# Altium PCB Task_5.PcbDoc
Units mm, origin at the board's own origin, x right, y up, seen from the top; angles counter-clockwise.
Board outline 69.98 x 20.07 mm, 2 copper layers (Top Layer, Bottom Layer); 13 components, 41 nets, 88 pads, 73 vias.
Unrouted connection lines stored in the file: 3.
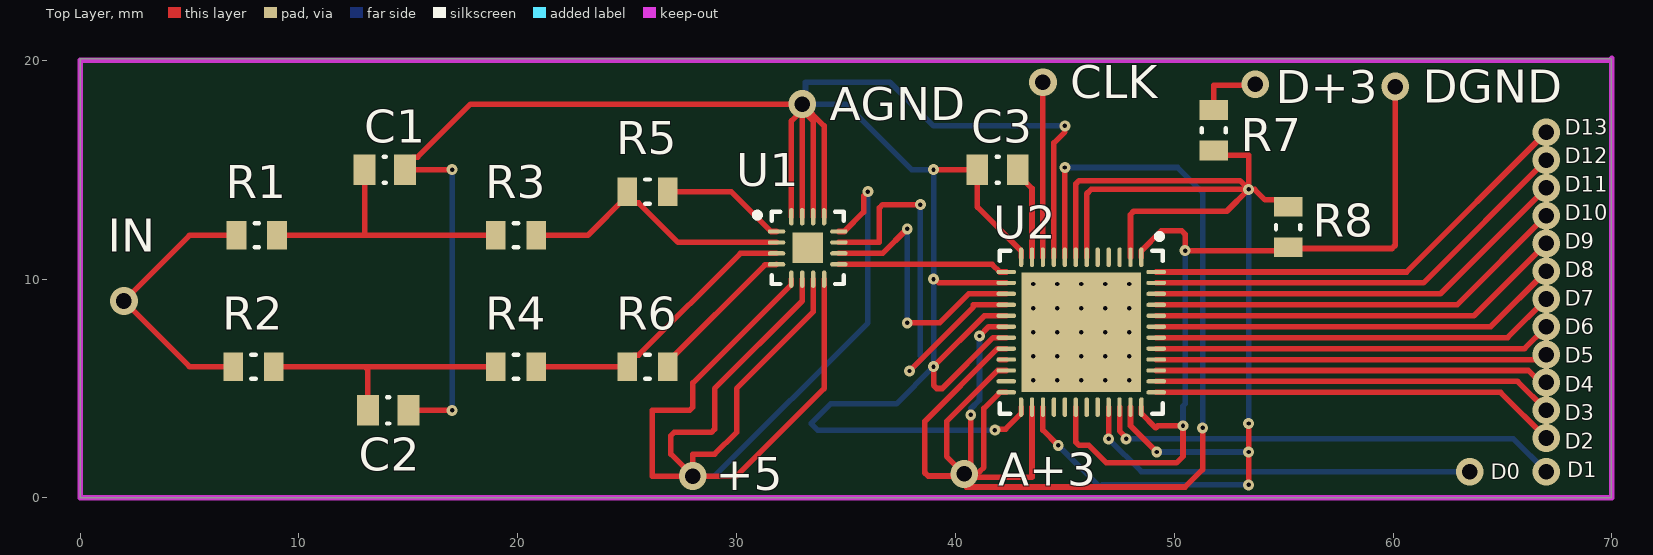
[diagram p0: Top Layer view]
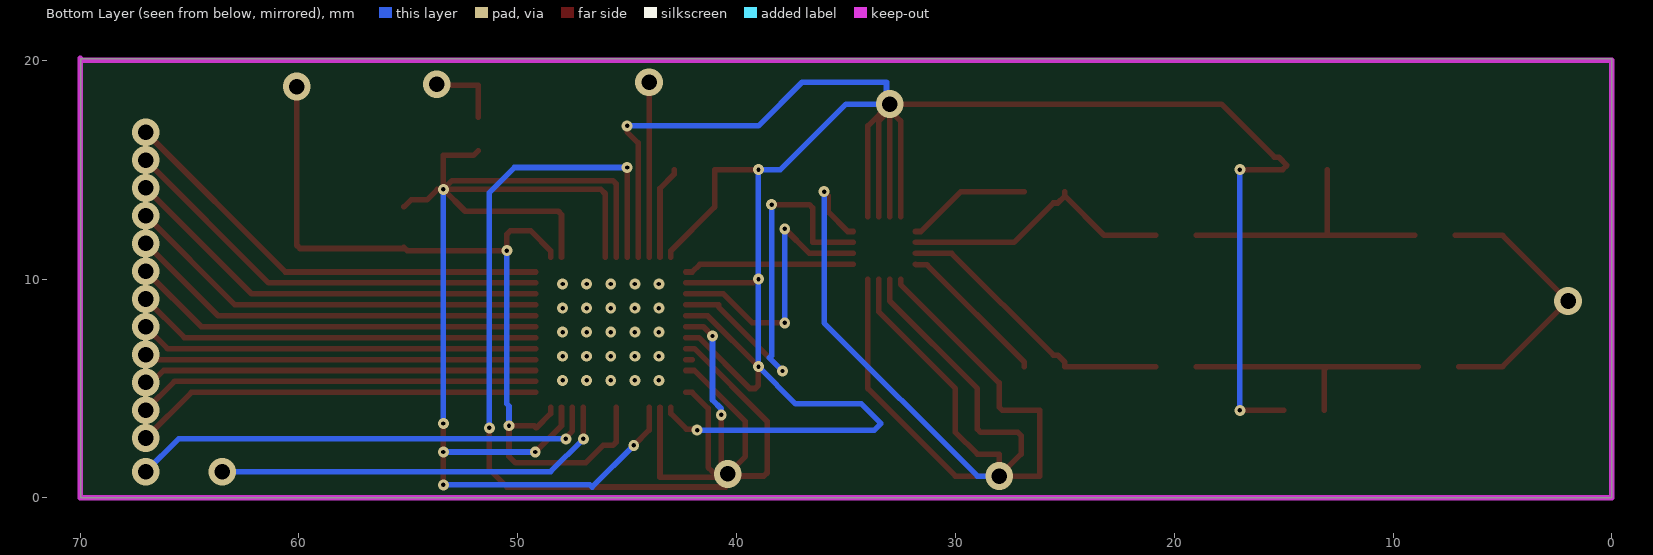
[diagram p1: Bottom Layer view, seen from below]

## Layer stack, top to bottom
Top Solder: solder mask 0.0102, Solder Resist, Dk 3.5
Top Layer: signal copper 0.0356
Dielectric 1: dielectric 0.32, FR-4, Dk 4.8
Bottom Layer: signal copper 0.0356
Bottom Solder: solder mask 0.0102, Solder Resist, Dk 3.5

## Board outline
0,0 69.977,0 69.977,0.381 69.977,20.066 0,20.066

## Design rules (kind name [scope] priority, off if disabled: settings)
AssemblyTestpoint [All] p1 off: testpointundercomponent=TRUE minsize=1.016 maxsize=2.54 preferedsize=1.524 minholesize=0 maxholesize=1.016 preferedholesize=0.813 testpointgrid=0.025 usegrid=TRUE gridtolerance=0 allowsidetop=TRUE allowsidebottom=TRUE
Clearance [All] p1 off: gap=0.254 ignorepadtopadclearanceinfootprint=FALSE except(0: Arc-Hole Track-Hole SMDPad-Hole THPad-Hole Via-Hole Fill-Hole Poly-Hole Region-Hole Text-Hole)
ComponentClearance [All] p1 off: gap=0.254 collisioncheckmode=3 verticalgap=0.254 showdistances=FALSE
HoleToHoleClearance [All] p1 off: gap=0.254 allowstackedmicrovias=TRUE
PolygonConnect [All] p1: connectstyle=Relief reliefconductorwidth=0.254 reliefentries=4 polygonreliefangle="90 Angle" airgapwidth=0.254
RoutingVias [All] p1: holewidth=0.711 width=1.27 viastyle="Through Hole" minholewidth=0.711 minwidth=1.27 maxholewidth=0.711 maxwidth=1.27
SolderMaskExpansion [All] p1: expansion=0.102 istentingtop=FALSE
Width [All] p1: maxlimit=0.254 minlimit=0.254 preferedwidth=0.254
27 further rules are at their usual default settings.

## Components (designator, comment, footprint, x,y, rotation, side; value= is the part's Value field where it differs from the comment)
C1 "С" C 13.925,15 r0 top value=200n
C2 "С" C 14.075,4 r0 top value=200n
C3 "С" C 41.925,15 r180 top value=200n
R1 "R" R 8.075,12 r0 top value=1K
R2 "R" R 7.925,6 r0 top value=1K
R3 "R" R 19.925,12 r0 top value=1K
R4 "R" R 19.925,6 r0 top value=1K
R5 "R" R 25.925,14 r180 top value=1K
R6 "R" R 25.925,6 r180 top value=1K
R7 "R" R 51.8,16.8 r270 top value=1K
R8 "R" R 55.2,12.375 r270 top value=1K
U1 "ADA4932-1" ADA4932 33.25,11.425 r0 top
U2 "ADS61B29" ADS61B29 45.75,7.575 r270 top

## Footprints (in the part's own frame and the unit in brackets; to place one, negate y for a bottom-side part, rotate by r counter-clockwise, add the part's x,y. Pads: shape width x height; smd on the part's side, far side on the other; paste and mask are expansions set on the pad)
ADA4932 [mm] "QFN, 16-Leads, Body 3,00x3,00mm, Pitch 0,50mm, Thermal Pad 1,40x1,40mm, IPC Medium Density"
  oval 0.8x0.2 smd: 1(-1.425,0.75) 2(-1.425,0.25) 3(-1.425,-0.25) 4(-1.425,-0.75) 9(1.425,-0.75) 10(1.425,-0.25) 11(1.425,0.25) 12(1.425,0.75)
  oval 0.2x0.8 smd: 5(-0.75,-1.425) 6(-0.25,-1.425) 7(0.25,-1.425) 8(0.75,-1.425) 13(0.75,1.425) 14(0.25,1.425) 15(-0.25,1.425) 16(-0.75,1.425)
  rect 1.4x1.4 smd: 17(0,0)
  silkscreen extent -2.42,-1.65 1.65,1.65, body extent -1.5,-1.5 1.5,1.5, height 1
ADS61B29 [mm] "QFN, 48-Leads, Body 7,00x7,00mm, Pitch 0,50mm, Thermal Pad 5,45x5,45mm, IPC Medium Density"
  oval 0.9x0.2 smd: 1(-3.425,2.75) 2(-3.425,2.25) 3(-3.425,1.75) 4(-3.425,1.25) 5(-3.425,0.75) 6(-3.425,0.25) 7(-3.425,-0.25) 8(-3.425,-0.75) 9(-3.425,-1.25) 10(-3.425,-1.75) 11(-3.425,-2.25) 12(-3.425,-2.75) 25(3.425,-2.75) 26(3.425,-2.25) 27(3.425,-1.75) 28(3.425,-1.25) 29(3.425,-0.75) 30(3.425,-0.25) 31(3.425,0.25) 32(3.425,0.75) 33(3.425,1.25) 34(3.425,1.75) 35(3.425,2.25) 36(3.425,2.75)
  oval 0.2x0.9 smd: 13(-2.75,-3.425) 14(-2.25,-3.425) 15(-1.75,-3.425) 16(-1.25,-3.425) 17(-0.75,-3.425) 18(-0.25,-3.425) 19(0.25,-3.425) 20(0.75,-3.425) 21(1.25,-3.425) 22(1.75,-3.425) 23(2.25,-3.425) 24(2.75,-3.425) 37(2.75,3.425) 38(2.25,3.425) 39(1.75,3.425) 40(1.25,3.425) 41(0.75,3.425) 42(0.25,3.425) 43(-0.25,3.425) 44(-0.75,3.425) 45(-1.25,3.425) 46(-1.75,3.425) 47(-2.25,3.425) 48(-2.75,3.425)
  rect 5.45x5.45 smd: 49(0,0)
  silkscreen extent -4.5,-3.73 3.73,3.72, body extent -3.57,-3.58 3.58,3.57, height 1
C [mm] "Chip Capacitor, 2-Leads, Body 2,05x1,27mm, IPC Medium Density"
  rect 1x1.4 smd: 1(-0.925,0) 2(0.925,0)
  silkscreen extent -0.05,-0.6 0.05,0.6, body extent -1,-0.63 1,0.63, height 0.6
R [mm] "Chip Resistor, 2-Leads, Body 2,00x1,25mm, IPC Medium Density"
  rect 0.9x1.3 smd: 1(-0.925,0) 2(0.925,0)
  silkscreen extent -0.1,-0.55 0.1,0.55, body extent -1,-0.63 1,0.63, height 0.6

## Via types
v1: diameter 0.5, hole 0.2, Top Layer to Bottom Layer, 51 vias
v2: diameter 1.27, hole 0.711, Top Layer to Bottom Layer, 22 vias

## Nets (pads, with @x,y where several pads share a name; then routed paths per layer and width w, separated by ;. In a path a pad name is that pad's centre, name@x,y a point inside that pad or via, vN(x,y) a via of type N, cw(c..) or ccw(c..) an arc to the next point about the centre after c; other vN are vias at no path point)
+3: R7.1
+3.3: U2.8 U2.18 U2.20 U2.22 U2.24 U2.26 | length 69.6
  Top Layer w0.254: 40.4,1.1 39.6,1.9 39.6,3.5 41.925,5.825 U2.22 ; v1(40.7,3.8) 40.7,1.207 40.496,1.004 ; 41.1,1.2 41.3,1.4 41.3,4.096 42.029,4.825 U2.24 ; v1(41.1,7.4) 41.525,7.825 U2.18 ; U2.20 41.925,6.825 38.6,3.5 38.6,1.152 38.749,1.004 40.496,1.004 ; U2.26 43.5,0.949 40.551,0.949 40.496,1.004 ; U2.8 v1(45,15.1) ; v1(51.3,3.2) 51.3,1.3 50.5,0.5 40.501,0.5 40.496,0.504 40.496,1.004
  Bottom Layer w0.254: v1(40.7,3.8) 40.7,4.075 41.1,4.475 v1(41.1,7.4) ; v1(45,15.1) 50.151,15.1 51.3,13.951 v1(51.3,3.2)
+5: U1.5 U1.6 U1.7 U1.8 U1.12 | length 71.3
  Top Layer w0.254: U1.5 32.5,9.754 28,5.254 28,4.149 27.851,4 26.149,4 26.149,1 28,1 ; U1.6 33,9 29,5 29,3.149 28.851,3 27.149,3 27,2.851 27,2 28,1 ; U1.7 33.5,8.5 30,5 30,3 29,2 28,2 28,1 ; U1.8 34,5 30,1 28,1 ; U1.12 34.921,12.175 35.806,13.06 35.806,13.806 v1(36,14)
  Bottom Layer w0.254: 28,1 29,1 36,8 v1(36,14)
DGND: R8.2 U2.1 U2.30 U2.36 | length 39.4
  Top Layer w0.254: U2.30 45.5,2.549 45.649,2.4 46.1,2.4 46.9,1.6 50.1,1.6 50.4,1.9 v1(50.4,3.3) 49.254,3.3 49.154,3.2 48.5,3.854 U2.36 ; U2.1 48.5,11.296 49.404,12.2 50.351,12.2 50.5,12.051 v1(50.5,11.3) 55.05,11.3 R8.2 55.25,11.4 59.951,11.4 60.1,11.549 60.1,18.8
  Bottom Layer w0.254: v1(50.4,3.3) 50.4,4.2 50.5,4.3 v1(50.5,11.3)
GND: C1.2 C2.2 C3.2 U1.13 U1.14 U1.15 U1.16 U2.9 U2.12 U2.14 U2.17 U2.19 U2.25 | length 128.3
  Top Layer w0.254: C2.2 v1(17,4) ; v1(17,15) 15.05,15 14.85,15.2 15.223,15.573 15.423,15.573 17.85,18 v2(33,18) ; U1.16 32.5,17.225 v2@33,17.725 ; U1.15 v2@33,17.725 ; U1.14 33.5,17.225 v2@33,17.725 ; U1.13 34,17 v2(33,18) ; v1(39,10) 39.067,10 39.242,9.825 U2.14 ; v1(39,15) C3.2 41,13.296 43,11.296 U2.12 ; v1(41.8,3.1) 41.847,3.147 42.293,3.147 43,3.854 U2.25 ; U2.19 41.725,7.325 39.4,5 39.149,5 39,5.149 v1(39,6) 41.325,8.325 U2.17 ; U2.9 44.5,16.225 45,16.725 v1(45,17) ; v2@33,17.725 v2(33,18)
  Bottom Layer w0.254: v1(17,4) v1(17,15) ; v1(41.8,3.1) 33.7,3.1 33.405,3.395 33.405,3.405 34.3,4.3 37.3,4.3 v1(39,6) v1(39,10) v1(39,15) 38,15 35,18 v2(33,18) 33.149,18.149 33.149,19 37,19 39,17 v1(45,17)
NetC1_1: C1.1 R1.2 R3.1 | length 13
  Top Layer w0.254: R1.2 13,12 ; C1.1 13,12 ; R3.1 13,12
NetC2_1: C2.1 R2.2 R4.1 | length 12.2
  Top Layer w0.254: R2.2 13,6 ; C2.1 13.15,5.85 13,6 ; R4.1 13,6
NetC3_1: C3.1 U2.11 | length 4.3
  Top Layer w0.254: C3.1 42.85,14.8 43.5,14.15 U2.11
NetR1_1: R1.1 R2.1
NetR3_2: R3.2 R5.2 U1.2 | length 12.8
  Top Layer w0.254: R3.2 23.2,12 R5.2@25,13.8 ; R5.2 R5.2@25,13.8 ; U1.2 27.325,11.675 25.523,13.477 25.323,13.477 R5.2@25,13.8
NetR4_2: R4.2 R6.2 U1.3 | length 13.2
  Top Layer w0.254: R4.2 R6.2 25,6.2 25.323,6.523 25.523,6.523 30.175,11.175 U1.3
NetR5_1: R5.1 U1.1 | length 5.7
  Top Layer w0.254: R5.1 29.754,14 31.579,12.175 U1.1
NetR6_1: R6.1 U1.4 | length 7
  Top Layer w0.254: R6.1 26.85,6.2 31.298,10.648 31.798,10.648 U1.4
NetR7_2: R7.2 R8.1 U2.2 U2.6 U2.7 U2.27 U2.35 | length 70.6
  Top Layer w0.254: U2.27 44,3.1 v1(44.7,2.4) ; U2.7 45.5,14.351 45.649,14.5 53,14.5 v1(53.4,14.1) ; U2.6 46,13.9 46.2,14.1 v1(53.4,14.1) ; U2.35 48,3.3 v1(49.2,2.1) ; U2.2 48,12.951 48.149,13.1 52.4,13.1 v1(53.4,14.1) ; R7.2 52.024,15.651 53.4,15.651 v1(53.4,14.1) ; 51.8,17.4 51.8,18.851 53.749,18.851 53.9,18.7 ; v1(53.4,0.6) v1(53.4,2.1) v1(53.4,3.4) ; R8.1 54.877,13.623 54.152,13.623 53.675,14.1 v1(53.4,14.1)
  Bottom Layer w0.254: v1(44.7,2.4) 46.6,0.5 46.7,0.6 v1(53.4,0.6) ; v1@49.133,2.1 v1(49.2,2.1) v1(53.4,2.1) ; v1(53.4,3.4) v1(53.4,14.1)
NetU1_9: U1.9 U2.13 | length 7.8
  Top Layer w0.254: U1.9 41.679,10.675 42.029,10.325 U2.13
NetU1_10: U1.10 U2.15 | length 13
  Top Layer w0.254: U1.10 36.675,11.175 v1(37.8,12.3) ; v1(37.8,8) 39.275,8 40.6,9.325 U2.15
  Bottom Layer w0.254: v1(37.8,8) v1(37.8,12.3)
NetU1_11: U1.11 U2.16 | length 19
  Top Layer w0.254: U1.11 36.526,11.675 36.526,13.251 36.675,13.4 v1(38.4,13.4) ; v1(37.9,5.8) 40.825,8.725 40.825,8.825 U2.16
  Bottom Layer w0.254: v1(37.9,5.8) 38.5,6.4 38.4,6.5 v1(38.4,13.4)
NetU2_3: U2.3
NetU2_4: U2.4
NetU2_5: U2.5
NetU2_10: U2.10 | length 8
  Top Layer w0.254: U2.10 v2(44,19)
NetU2_21: U2.21 | length 0.3
  Top Layer w0.254: U2.21@42.029,6.325 U2.21
NetU2_23: U2.23
NetU2_28: U2.28
NetU2_29: U2.29
NetU2_31: U2.31
NetU2_32: U2.32
NetU2_33: U2.33 | length 18.6
  Top Layer w0.254: v1(47,2.7) U2.33
  Bottom Layer w0.254: v1(47,2.7) 48.5,1.2 63.5,1.2
NetU2_34: U2.34 | length 21.4
  Top Layer w0.254: U2.34 47.5,3.067 47.8,2.767 v1(47.8,2.7)
  Bottom Layer w0.254: v1(47.8,2.7) 65.5,2.7 67,1.2
NetU2_37: U2.37 | length 18.7
  Top Layer w0.254: U2.37 64.915,4.825 v2(67,2.74)
NetU2_38: U2.38 | length 18.4
  Top Layer w0.254: U2.38 65.685,5.325 v2(67,4.01)
NetU2_39: U2.39 | length 18.1
  Top Layer w0.254: U2.39 66.18,5.825 66.725,5.28 v2(67,5.28)
NetU2_40: U2.40 | length 17.9
  Top Layer w0.254: U2.40 66.5,6.325 66.725,6.55 v2(67,6.55)
NetU2_41: U2.41 | length 18.2
  Top Layer w0.254: U2.41 66.005,6.825 v2(67,7.82)
NetU2_42: U2.42 | length 18.6
  Top Layer w0.254: U2.42 65.235,7.325 v2(67,9.09)
NetU2_43: U2.43 | length 18.9
  Top Layer w0.254: U2.43 64.465,7.825 v2(67,10.36)
NetU2_44: U2.44 | length 19.2
  Top Layer w0.254: U2.44 63.695,8.325 v2(67,11.63)
NetU2_45: U2.45 | length 19.5
  Top Layer w0.254: U2.45 62.925,8.825 v2(67,12.9)
NetU2_46: U2.46 | length 19.8
  Top Layer w0.254: U2.46 62.155,9.325 v2(67,14.17)
NetU2_47: U2.47 | length 20.2
  Top Layer w0.254: U2.47 61.385,9.825 v2(67,15.44)
NetU2_48: U2.48 | length 20.5
  Top Layer w0.254: U2.48 60.615,10.325 v2(67,16.71)
pads on no net: U1.17 U2.49
copper on no net: | length 12.6
  Top Layer w0.254: 7,6 5,6 v2(2,9) 5,12 7.15,12
  other v1: 43.55,5.375 44.65,5.375 45.75,5.375 46.85,5.375 47.95,5.375 43.55,6.475 44.65,6.475 45.75,6.475 46.85,6.475 47.95,6.475 43.55,7.575 44.65,7.575 45.75,7.575 46.85,7.575 47.95,7.575 43.55,8.675 44.65,8.675 45.75,8.675 46.85,8.675 47.95,8.675 43.55,9.775 44.65,9.775 45.75,9.775 46.85,9.775 47.95,9.775
  other v2: 28,1 40.4,1.1 40.4,1.1 63.5,1.2 67,1.2 60.1,18.8 53.7,18.9

## Keep-outs
Top Layer:
  lines w0.254: 69.9,20 70,20.1
Keep-Out Layer:
  lines w0.254: 69.9,20 0,20 0,0 70,0 70,20.1

## Silkscreen, mask and mechanical layers (free items; w line width, h text height)
Top Overlay:
  text "CLK" at 45.254,18.254 h1.52
  text "DGND" at 61.354,18.054 h1.52
  text "D+3" at 54.646,18.046 h1.52
  text "AGND" at 34.254,17.254 h1.52
  text "D13" at 67.854,16.601 h0.7
  text "D12" at 67.854,15.297 h0.7
  text "D11" at 67.854,13.992 h0.7
  text "D10" at 67.854,12.688 h0.7
  text "D9" at 67.854,11.384 h0.7
  text "IN" at 1.254,11.254 h1.52
  text "D8" at 67.854,10.08 h0.7
  text "D7" at 67.854,8.776 h0.7
  text "D6" at 67.854,7.472 h0.7
  text "D5" at 67.847,6.168 h0.7
  text "D4" at 67.836,4.864 h0.7
  text "D3" at 67.852,3.56 h0.7
  text "D2" at 67.852,2.256 h0.7
  text "D1" at 67.952,0.952 h0.7
  text "D0" at 64.454,0.854 h0.7
  text "A+3" at 41.954,0.554 h1.52
  text "+5" at 29.054,0.354 h1.52